# Altium PCB CT310高端控制盒AB按键电路V1.1.PcbDoc
Units mm, origin at the board's own origin, x right, y up, seen from the top; angles counter-clockwise.
Board outline 12.6 x 129.62 mm, 2 copper layers (Top Layer, Bottom Layer), stack 1.671 mm thick; 11 components, 9 nets, 31 pads, 8 vias.
Unrouted connection lines stored in the file: 1.
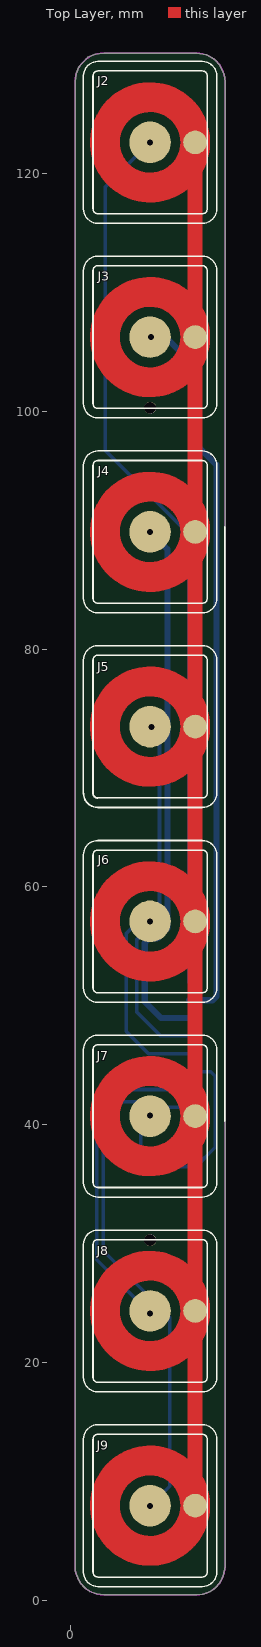
[diagram p0: Top Layer view]
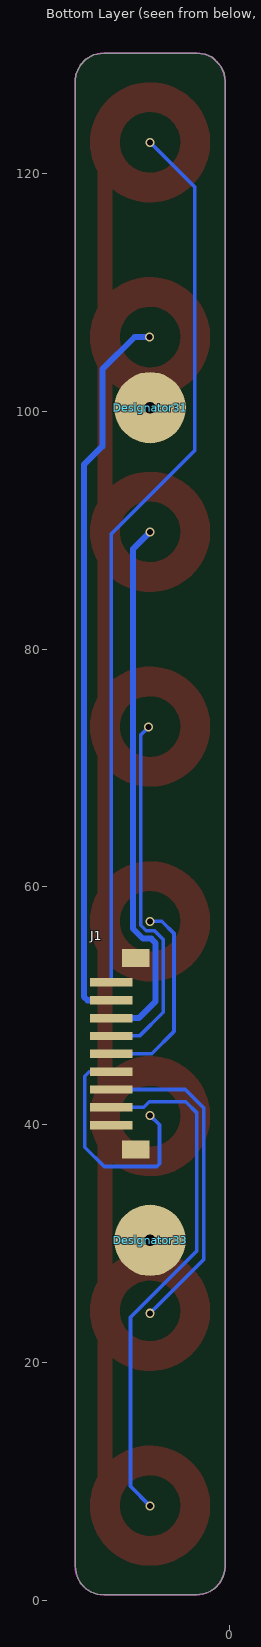
[diagram p1: Bottom Layer view, seen from below]

## Layer stack, top to bottom
Top Layer: signal copper 0.0356
Dielectric: core 1.6, FR-4, Dk 4.8
Bottom Layer: signal copper 0.0356

## Board outline
0.406,2.883 0.406,127.703 0.483,128.397 0.711,128.93 1.016,129.286 1.448,129.743 2.057,129.997 2.806,130.103 10.606,130.103 11.455,129.972 12.116,129.591 12.573,129.083 12.954,128.321 13.006,127.703 13.006,2.883 12.852,2.083 12.573,1.499 12.141,1.016 11.735,0.737 11.151,0.533 10.606,0.483 2.806,0.483 2.21,0.584 1.651,0.762 1.245,1.041 0.838,1.473 0.61,1.93 0.432,2.464 0.406,2.883

## Design rules (kind name [scope] priority, off if disabled: settings)
Clearance [All] p1: gap=0.254
PolygonConnect [All] p1: connectstyle=Relief reliefconductorwidth=0.254 reliefentries=4 polygonreliefangle="90 Angle" airgapwidth=0.254
RoutingVias [All] p1: holewidth=0.711 width=1.27 viastyle="Through Hole" minholewidth=0.254 minwidth=0.254 maxholewidth=0.711 maxwidth=1.27
SilkToSolderMaskClearance SilkscreenOverComponentPads [IsPad] p1: minsilkscreentomaskgap=0.254 clearancetoexposedcopper=TRUE
SolderMaskExpansion [All] p1: expansion=0.102
Width [All] p1: maxlimit=1.27 minlimit=0.254 preferedwidth=0.254
27 further rules are at their usual default settings.

## Classes and differential pairs
component class CT310高端控制盒AB按键电路V1.0: J1 J2 J3 J4 J5 J6 J7 J8 J9

## Components (designator, comment, footprint, x,y, rotation, side; value= is the part's Value field where it differs from the comment)
Designator31 "Comment" PCB铜柱M3 6.706,100.293 r0 bottom
Designator33 "Comment" PCB铜柱M3 6.706,30.293 r0 bottom
J1 "HEADER1X9" ZH1X9LT-1.5 8.941,45.974 r270 bottom
J2 "HEADER1X2" 薄膜按键#1 6.706,122.606 r0 top
J3 "HEADER1X2" 薄膜按键#2 6.706,106.23 r0 top
J4 "HEADER1X2" 薄膜按键#2 6.706,89.855 r0 top
J5 "HEADER1X2" 薄膜按键#2 6.706,73.48 r0 top
J6 "HEADER1X2" 薄膜按键#2 6.706,57.105 r0 top
J7 "HEADER1X2" 薄膜按键#2 6.706,40.73 r0 top
J8 "HEADER1X2" 薄膜按键#2 6.706,24.355 r0 top
J9 "HEADER1X2" 薄膜按键#1 6.706,7.98 r0 top

## Footprints (in the part's own frame and the unit in brackets; to place one, negate y for a bottom-side part, rotate by r counter-clockwise, add the part's x,y. Pads: shape width x height; smd on the part's side, far side on the other; paste and mask are expansions set on the pad)
PCB铜柱M3 [mm]
  round 6 smd: 0(0,0)
  round 1 hole 1: 0(0,0)
ZH1X9LT-1.5 [mm]
  rect 1.5x2.3 smd: 0(-8.05,1.025) 0(8.05,1.025)
  rect 0.7x3.6 smd: 1(-6,-1.025) 2(-4.5,-1.025) 3(-3,-1.025) 4(-1.5,-1.025) 5(0,-1.025) 6(1.5,-1.025) 7(3,-1.025) 8(4.5,-1.025) 9(6,-1.025)
  body extent -8.22,-2.71 5.28,2.49, height 5
薄膜按键#1 [mm]
  round 3.5 smd: 1(0,0)
  round 2 smd: 2(3.785,0)
  Top Layer lines w2.4: -3.8,0 cw(c0,0) 3.8,0
  Top Layer lines w2.5: -3.799,-0.068 ccw(c0,0) 3.785,-0.342 ; 3.785,-0.342 ccw(c0,0) 3.8,0 ; 3.785,-0.342 cw(c0,0) 3.8,0 ; 3.785,-0.342 ccw(c0,0) 3.8,0
薄膜按键#2 [mm]
  round 3.5 smd: 1(0,0)
  round 2 smd: 2(3.785,0)
  Top Layer lines w2.4: -3.8,0 cw(c0,0) 3.785,0.342 cw(c0,0) 3.8,0
  Top Layer lines w2.5: -3.799,-0.068 ccw(c0,0) 3.785,-0.342 ; 3.785,-0.342 ccw(c0,0) 3.8,0 ; 3.785,-0.342 cw(c0,0) 3.785,0.342 cw(c0,0) 3.8,0 ; 3.785,-0.342 ccw(c0,0) 3.8,0

## Via types
v1: diameter 0.762, hole 0.508, Top Layer to Bottom Layer, tented both sides, 8 vias

## Nets (pads, with @x,y where several pads share a name; then routed paths per layer and width w, separated by ;. In a path a pad name is that pad's centre, name@x,y a point inside that pad or via, vN(x,y) a via of type N, cw(c..) or ccw(c..) an arc to the next point about the centre after c; other vN are vias at no path point)
A_K1: J1.1 J2.1 | length 75.1
  Bottom Layer w0.305: v1(6.706,122.606) 2.946,118.846 2.946,96.698 9.966,89.678 J1.1
A_K2: J1.2 J3.1 | length 61
  Top Layer w0.305: J3.1 v1(6.774,106.23)
  Bottom Layer w0.508: v1(6.774,106.23) 8.019,106.23 10.719,103.53 10.719,97.053 12.274,95.498 12.274,50.78 11.968,50.474 J1.2
A_K3: J1.3 J4.1 | length 45.6
  Bottom Layer w0.508: v1(6.706,89.855) 8.153,88.408 8.153,56.506 7.305,55.658 6.61,55.658 6.258,55.305 6.258,50.359 7.643,48.974 J1.3
A_K4: J1.4 J5.1 | length 30.6
  Bottom Layer w0.305: v1(6.833,73.431) 7.493,72.771 7.493,56.779 7.032,56.318 6.337,56.318 5.597,55.579 5.597,49.47 7.593,47.474 J1.4
A_K5: J1.5 J6.1 | length 16.7
  Bottom Layer w0.305: v1(6.706,57.105) 5.721,57.105 4.699,56.083 4.699,47.854 6.579,45.974 J1.5
A_K6: J1.6 J7.1 | length 19.8
  Top Layer w0.305: J7.1 v1(6.706,40.792)
  Bottom Layer w0.305: v1(6.706,40.792) 5.918,40.005 5.918,36.728 6.147,36.5 10.566,36.5 12.192,38.125 12.192,44.094 11.812,44.474 J1.6
A_K7: J1.7 J8.1 | length 27.7
  Top Layer w0.305: v1(6.706,24.155) J8.1
  Bottom Layer w0.305: v1(6.706,24.155) 2.21,28.651 2.21,41.427 3.756,42.974 J1.7
A_K8: J1.8 J9.1 | length 43.9
  Top Layer w0.305: v1(6.706,7.95) J9.1
  Bottom Layer w0.305: v1(6.706,7.95) 8.357,9.601 8.357,23.825 2.769,29.413 2.769,40.996 3.708,41.935 6.782,41.935 7.243,41.474 J1.8
GND: J1.9 J2.2 J3.2 J4.2 J5.2 J6.2 J7.2 J8.2 J9.2 | length 110.2
  Top Layer w1.27: J9.2@10.49,8.322 J8.2@10.49,24.014 ; J8.2@10.49,24.697 J7.2@10.49,40.389 ; J7.2@10.49,41.072 10.49,49.073 10.49,56.764 J6.2 ; J6.2@10.49,57.447 J5.2@10.49,73.139 ; J5.2@10.49,73.822 J4.2@10.49,89.514 ; J4.2@10.49,90.197 J3.2@10.49,105.889 ; J3.2@10.49,106.572 J2.2@10.49,122.264
pads on no net: Designator31.0 Designator33.0 J1.0

## Keep-outs
Keep-Out Layer:
  lines w0.127: 0.406,2.883 ccw(c2.806,2.883) 2.806,0.483 10.606,0.483 ccw(c10.606,2.883) 13.006,2.883 13.006,127.703 ccw(c10.606,127.703) 10.606,130.103 2.806,130.103 ccw(c2.806,127.703) 0.406,127.703 0.406,2.883

## Silkscreen, mask and mechanical layers (free items; w line width, h text height)
Top Overlay:
  lines w0.127: 1.106,67.88 1.106,79.08 cw(c2.306,79.08) 2.306,80.28 11.106,80.28 cw(c11.106,79.08) 12.306,79.08 12.306,67.88 cw(c11.106,67.88) 11.106,66.68 4.606,66.68 2.306,66.68 cw(c2.306,67.88) 1.406,67.087 ; 1.906,67.88 1.906,78.659 1.906,79.08 cw(c2.306,79.08) 2.306,79.48 11.106,79.48 cw(c11.106,79.08) 11.506,79.08 11.506,67.88 cw(c11.106,67.88) 11.106,67.48 4.606,67.48 2.306,67.48 ; 13,40.293 13,90.293 ; 1.106,2.38 ccw(c2.306,2.38) 2.306,1.18 11.106,1.18 ccw(c11.106,2.38) 12.306,2.38 12.306,13.58 ccw(c11.106,13.58) 11.106,14.78 2.306,14.78 ccw(c2.306,13.58) 1.106,13.58 1.106,2.38 ; 1.106,18.755 ccw(c2.306,18.755) 2.306,17.555 11.106,17.555 ccw(c11.106,18.755) 12.306,18.755 12.306,29.955 ccw(c11.106,29.955) 11.106,31.155 2.306,31.155 ccw(c2.306,29.955) 1.106,29.955 1.106,18.755 ; 1.106,35.13 ccw(c2.306,35.13) 2.306,33.93 11.106,33.93 ccw(c11.106,35.13) 12.306,35.13 12.306,46.33 ccw(c11.106,46.33) 11.106,47.53 2.306,47.53 ccw(c2.306,46.33) 1.106,46.33 1.106,35.13 ; 1.106,51.505 ccw(c2.306,51.505) 2.306,50.305 11.106,50.305 ccw(c11.106,51.505) 12.306,51.505 12.306,62.705 ccw(c11.106,62.705) 11.106,63.905 4.606,63.905 2.306,63.905 ccw(c2.306,62.705) 1.406,63.499 ccw(c2.306,62.705) 1.106,62.705 1.106,51.505 ; 1.106,84.255 ccw(c2.306,84.255) 2.306,83.055 11.106,83.055 ccw(c11.106,84.255) 12.306,84.255 12.306,95.455 ccw(c11.106,95.455) 11.106,96.655 2.306,96.655 ccw(c2.306,95.455) 1.106,95.455 1.106,84.255 ; 1.106,100.63 ccw(c2.306,100.63) 2.306,99.43 11.106,99.43 ccw(c11.106,100.63) 12.306,100.63 12.306,111.83 ccw(c11.106,111.83) 11.106,113.03 2.306,113.031 ccw(c2.306,111.83) 1.106,111.83 1.106,100.63 ; 1.106,117.005 ccw(c2.306,117.005) 2.306,115.805 11.106,115.805 ccw(c11.106,117.005) 12.306,117.005 12.306,128.206 ccw(c11.106,128.206) 11.106,129.406 2.306,129.406 ccw(c2.306,128.206) 1.106,128.206 1.106,117.006 ; 1.906,2.38 ccw(c2.306,2.38) 2.306,1.98 11.106,1.98 ccw(c11.106,2.38) 11.506,2.38 11.506,13.58 ccw(c11.106,13.58) 11.106,13.98 2.306,13.98 ccw(c2.306,13.58) 1.906,13.58 1.906,2.38 ; 1.906,18.755 ccw(c2.306,18.755) 2.306,18.355 11.106,18.355 ccw(c11.106,18.755) 11.506,18.755 11.506,29.955 ccw(c11.106,29.955) 11.106,30.355 2.306,30.355 ccw(c2.306,29.955) 1.906,29.955 1.906,18.755 ; 1.906,35.13 ccw(c2.306,35.13) 2.306,34.73 11.106,34.73 ccw(c11.106,35.13) 11.506,35.13 11.506,46.33 ccw(c11.106,46.33) 11.106,46.73 2.306,46.73 ccw(c2.306,46.33) 1.906,46.33 1.906,35.13 ; 1.906,51.505 ccw(c2.306,51.505) 2.306,51.105 11.106,51.105 ccw(c11.106,51.505) 11.506,51.505 11.506,62.705 ccw(c11.106,62.705) 11.106,63.105 4.606,63.105 2.306,63.105 ccw(c2.306,62.705) 1.906,62.705 1.906,51.927 1.906,51.505 ; 1.906,84.255 ccw(c2.306,84.255) 2.306,83.855 11.106,83.855 ccw(c11.106,84.255) 11.506,84.255 11.506,95.455 ccw(c11.106,95.455) 11.106,95.855 2.306,95.855 ccw(c2.306,95.455) 1.906,95.455 1.906,84.255 ; 1.906,100.63 ccw(c2.306,100.63) 2.306,100.23 11.106,100.23 ccw(c11.106,100.63) 11.506,100.63 11.506,111.83 ccw(c11.106,111.83) 11.106,112.23 2.306,112.23 ccw(c2.306,111.83) 1.906,111.83 1.906,100.63 ; 1.906,117.005 ccw(c2.306,117.005) 2.306,116.605 11.106,116.605 ccw(c11.106,117.005) 11.506,117.005 11.506,128.206 ccw(c11.106,128.206) 11.106,128.606 2.306,128.606 ccw(c2.306,128.206) 1.906,128.206 1.906,117.006
  lines w0.15: 1.106,67.88 ccw(c2.306,67.88) 2.306,66.68 ; 1.906,67.88 ccw(c2.306,67.88) 2.306,67.48
Top Solder:
  circle w2.4: c6.706,7.98 r3.8
  circle w2.4: c6.706,24.355 r3.8
  circle w2.4: c6.706,40.73 r3.8
  circle w2.4: c6.706,57.105 r3.8
  circle w2.4: c6.706,73.48 r3.8
  circle w2.4: c6.706,89.855 r3.8
  circle w2.4: c6.706,106.23 r3.8
  circle w2.4: c6.706,122.606 r3.8

## Dimensions
0.406,2.883 to 13.006,2.883 on Keep-Out Layer
2.806,0.483 to 2.806,130.103 on Keep-Out Layer